# Altium PCB Power_Test.PcbDoc
Units mm, origin at the board's own origin, x right, y up, seen from the top; angles counter-clockwise.
Board outline 29.84 x 31.62 mm, 2 copper layers (Top Layer, Bottom Layer); 30 components, 17 nets, 83 pads, 52 vias.
Unrouted connection lines stored in the file: 17.
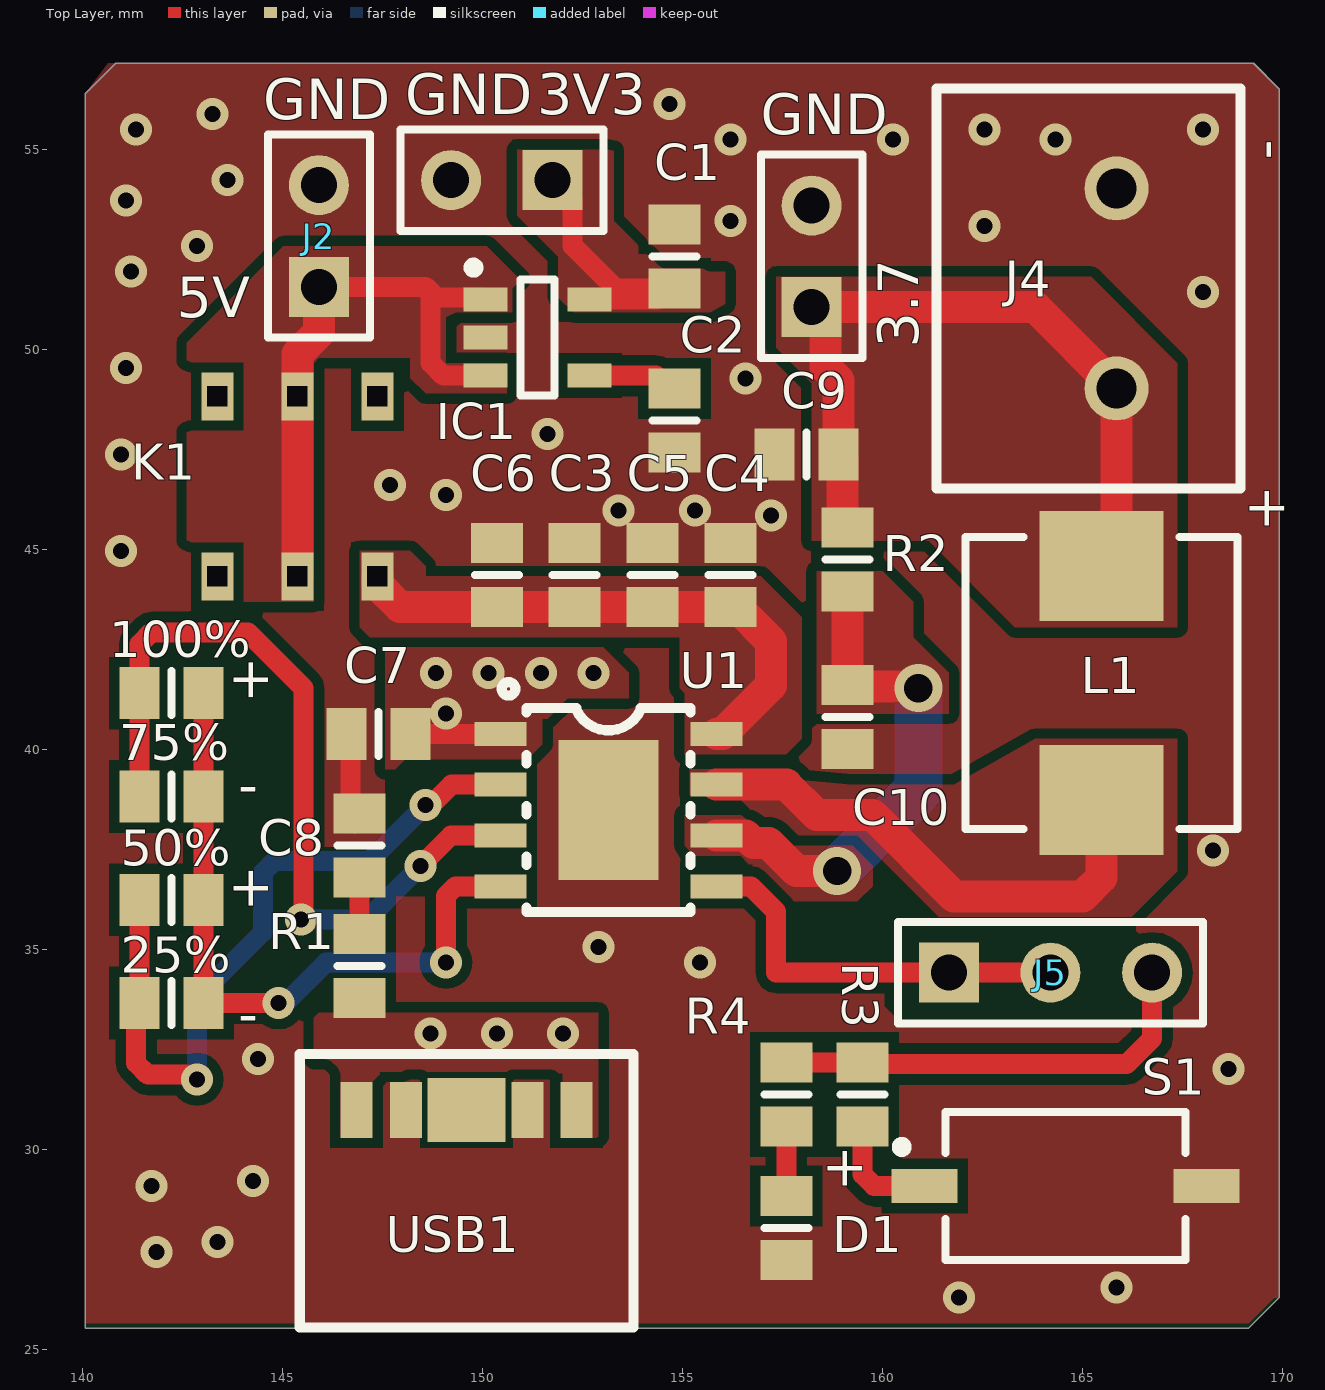
[diagram p0: Top Layer view]
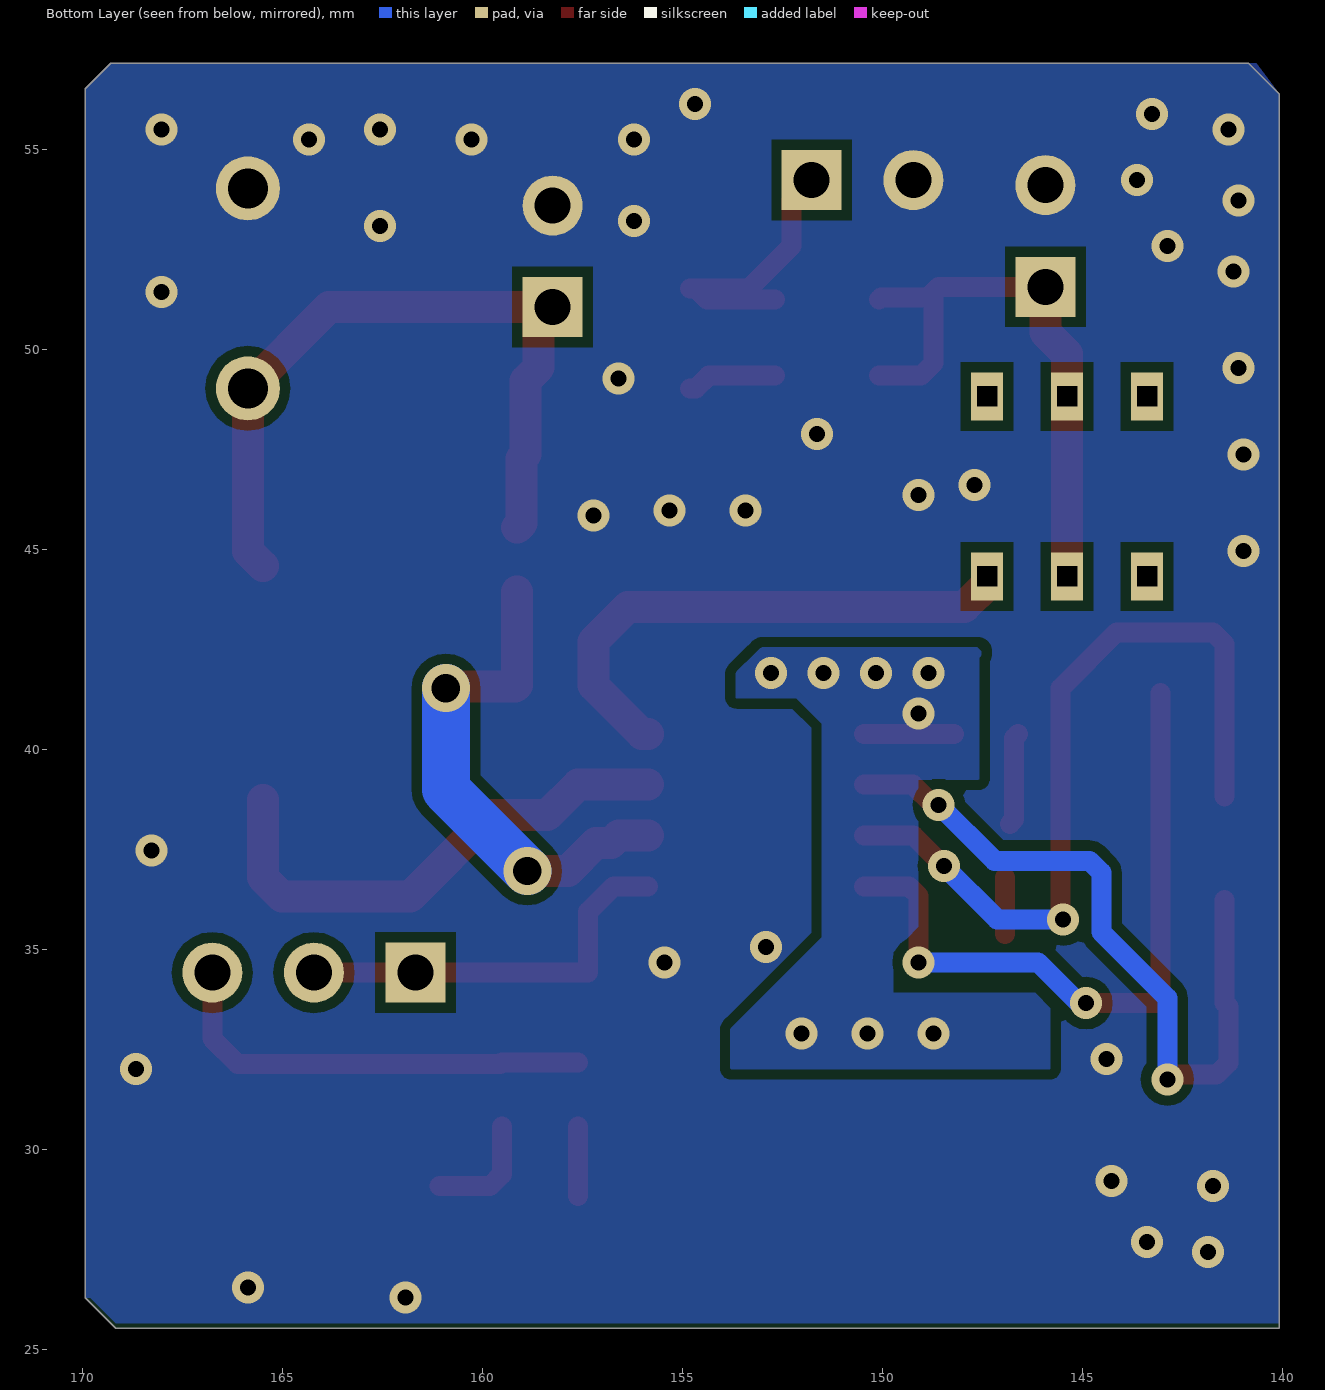
[diagram p1: Bottom Layer view, seen from below]

## Layer stack, top to bottom
Top Solder: solder mask 0.0102, Solder Resist, Dk 3.5
Top Layer: signal copper 0.0356
Dielectric 1: dielectric 0.32, FR-4, Dk 4.8
Bottom Layer: signal copper 0.0356
Bottom Solder: solder mask 0.0102, Solder Resist, Dk 3.5

## Board outline
140.081,25.527 140.081,56.388 140.843,57.15 169.291,57.15 169.926,56.515 169.926,26.289 169.164,25.527

## Design rules (kind name [scope] priority, off if disabled: settings)
Clearance [All] p1: gap=0.254 ignorepadtopadclearanceinfootprint=FALSE except(0: Arc-Hole Track-Hole SMDPad-SMDPad SMDPad-Hole THPad-Hole Via-Hole Fill-Hole Poly-Hole Region-Hole Text-Hole)
PlaneConnect [All] p1: planeconnectstyle=Direct reliefexpansion=0.508 reliefentries=4 reliefconductorwidth=0.254 reliefairgap=0.254
PolygonConnect [All] p1: connectstyle=Direct reliefconductorwidth=0.254 reliefentries=4 polygonreliefangle="90 Angle" airgapwidth=0.254
RoutingVias [All] p1: holewidth=0.4 width=0.8 viastyle="Through Hole" minholewidth=0.4 minwidth=0.8 maxholewidth=0.8 maxwidth=1.2
SolderMaskExpansion [All] p1: expansion=0.102
Width [All] p1: maxlimit=1.2 minlimit=0.3 preferedwidth=0.5
29 further rules are at their usual default settings.

## Classes and differential pairs
component class Power: 25% 50% 75% 100% C1 C2 C3 C4 C5 C6 C7 C8 C9 C10 D1 IC1 J2 J4 K1 L1 R1 R2 R3 R4 S1 U1 USB1

## Components (designator, comment, footprint, x,y, rotation, side; value= is the part's Value field where it differs from the comment)
25% "LED" 6-0805_L 142.24,33.655 r0 top
50% "LED" 6-0805_L 142.24,36.237 r180 top
75% "LED" 6-0805_L 142.24,38.82 r0 top
100% "LED" 6-0805_L 142.24,41.402 r180 top
C1 "2.2uF" 6-0805_L 154.813,52.324 r270 top
C2 "470pF" 6-0805_L 154.813,48.222 r90 top
C3 "22uf" 6-0805_L 152.315,44.361 r90 top
C4 "22uf" 6-0805_L 156.21,44.361 r90 top
C5 "22uf" 6-0805_L 154.263,44.361 r90 top
C6 "22uf" 6-0805_L 150.368,44.361 r90 top
C7 "10uf" 6-0805_L 147.409,40.386 r180 top
C8 "10uf" 6-0805_L 146.939,37.592 r90 top
C9 "22uf" 6-0805_L 158.115,47.371 r180 top
C10 "22uf" 6-0805_L 159.131,40.805 r270 top
D1 "LED" 6-0805_L 157.607,28.029 r270 top
IC1 "MIC5205-3.3" SOT-23-5 151.384,50.292 r0 top
J1 "3.3v" HDR1X2 151.765,54.229 r180 top
J2 "5v" HDR1X2 145.923,51.562 r90 top
J3 "3.7v" HDR1X2 158.242,51.054 r90 top
J4 "BAT" 接线座2P 165.862,51.522 r90 top
J5 "CON3" HDR1X3 161.671,34.417 r0 top
K1 "BUTTON" switch 143.383,44.323 r90 top
L1 "1UH" 0630电感 165.481,41.652 r90 top
R1 "2R" 6-0805_L 146.939,34.582 r270 top
R2 "0.5R" 6-0805_L 159.131,44.742 r270 top
R3 "10K" 6-0805_L 159.512,31.369 r90 top
R4 "20R" 6-0805_L 157.607,31.369 r90 top
S1 "SW SPST" button 164.592,29.083 r0 top
U1 "IP5306" ESOP8 149.679,40.376 r0 top
USB1 "USB" Type-C 149.614,30.988 r0 top

## Footprints (in the part's own frame and the unit in brackets; to place one, negate y for a bottom-side part, rotate by r counter-clockwise, add the part's x,y. Pads: shape width x height; smd on the part's side, far side on the other; paste and mask are expansions set on the pad)
6-0805_L [mm] "Chip Resistor, Body 2.0x1.2mm, IPC High Density"
  rect 1x1.3 smd: 1(-0.8,0) 2(0.8,0)
  silkscreen extent 0,-0.55 0,0.55, body extent -1.07,-0.7 1.07,0.7, height 0.7
0630电感 [mm] "Precision Wire Wound Inductor, 2-Leads, Body 7.30x6.60mm, IPC Medium Density"
  rect 2.75x3.1 smd: 1(-2.925,0) 2(2.925,0)
  silkscreen extent -3.65,-3.4 3.65,3.4, body extent -3.65,-3.4 3.65,3.4, height 3
button [mm] "SODFL, 2-Leads, Body 3.70x8.00mm, IPC Medium Density"
  rect 1.65x0.85 smd: 1(-3.525,0) 2(3.525,0)
  silkscreen extent -4.22,-1.85 3,1.85, body extent -3,-1.85 3,1.85, height 2.5
ESOP8 [mm]
  rect 1.3x0.6 smd: 1(0.783,0.01) 2(0.783,-1.26) 3(0.783,-2.53) 4(0.783,-3.8) 5(6.183,-3.8) 6(6.183,-2.53) 7(6.183,-1.26) 8(6.183,0.01)
  rect 2.5x3.5 smd: 9(3.483,-1.895)
  silkscreen extent 0.81,-4.44 5.53,1.3
HDR1X2 [mm] "Connector; Header; 2 Position"
  rect 1.5x1.5 hole 0.9: 1(0,0)
  round 1.5 hole 0.9: 2(2.54,0)
  silkscreen extent -1.27,-1.27 3.81,1.27
HDR1X3 [mm] "Connector; Header; 3 Position"
  rect 1.5x1.5 hole 0.9: 1(0,0)
  round 1.5 hole 0.9: 2(2.54,0) 3(5.08,0)
  silkscreen extent -1.27,-1.27 6.35,1.27
SOT-23-5 [mm]
  rect 1.1x0.6 smd: 1(-1.3,0.95) 2(-1.3,0) 3(-1.3,-0.95) 4(1.3,-0.95) 5(1.3,0.95)
  silkscreen extent -1.72,-1.45 0.43,1.87, body extent -1.37,-1.45 1.43,1.45, height 1.45
switch [mm]
  rect 1.2x0.8 hole 0.5 square: 1(0,0) 2(0,-2) 3(0,-4) 4(4.5,-4) 5(4.5,-2) 6(4.5,0)
Type-C [mm] "贴片母头"
  rect 0.8x1.4 smd: 1(-2.75,0) 1(2.75,0) 2(-1.52,0) 2(1.52,0) ""(-0.5,0) ""(0.5,0)
  rect 1.95x1.2 smd: ""(0,0) ""(0,0)
  rect 1.95x1.6 smd: ""(0,0) ""(0,0)
  silkscreen extent -4.17,-5.44 4.17,1.4
接线座2P [mm]
  round 1.6 hole 1: 1(-2.5,0) 2(2.5,0)
  silkscreen extent -5,-3.1 5,4.5

## Part data
C1 C2: library part "Cap Semi", "Capacitor (Semiconductor SIM Model)", LatestRevisionDate=29-May-2009, LatestRevisionNote="IPC-7351 Footprint Added.", PackageDescription="Chip Capacitor", PackageReference=C1206, Published=8-Jun-2000, Publisher="Altium Limited"
C3 C4 C5 C6 C7 C8 C9 C10: library part CAP, "电容"
IC1: "稳压"
J1 J2 J3 J4: library part CON2, "连接器"
J5: "连接器"
K1: "自锁按键"
L1: library part Inductor, "电感"
R1 R2 R3 R4: library part RES, "电阻"
USB1: library part CON2, "Conjunctor"

## Via types
v1: diameter 0.8, hole 0.4, Top Layer to Bottom Layer, tented both sides, 50 vias
v2: diameter 1.2, hole 0.711, Top Layer to Bottom Layer, tented both sides, 2 vias

## Nets (pads, with @x,y where several pads share a name; then routed paths per layer and width w, separated by ;. In a path a pad name is that pad's centre, name@x,y a point inside that pad or via, vN(x,y) a via of type N, cw(c..) or ccw(c..) an arc to the next point about the centre after c; other vN are vias at no path point)
GND: C1.1 C2.1 C3.2 C4.2 C5.2 C6.2 C7.2 C8.2 C9.2 C10.2 D1.2 IC1.2 J1.2 J2.2 J3.2 J4.2 S1.2 U1.9 USB1.2 USB1.@149.614,30.988 | length 2.3
  Top Layer w0.5: C7.2 146.71,40.285 146.71,38.24 C8.2@146.812,38.138
  other v1: 161.925,26.289 165.862,26.543 141.859,27.432 143.383,27.686 141.732,29.083 144.272,29.21 168.656,32.004 144.399,32.258 155.448,34.671 152.908,35.052 168.275,37.465 140.97,44.958 157.226,45.847 153.416,45.974 155.321,45.974 149.098,46.355 147.701,46.609 140.97,47.371 151.638,47.879 156.591,49.276 141.097,49.53 168.021,51.435 141.224,51.943 142.875,52.578 162.56,53.086 156.21,53.213 141.097,53.721 143.637,54.229 156.21,55.245 160.274,55.245 164.338,55.245 141.351,55.499 162.56,55.499 168.021,55.499 143.256,55.88 154.686,56.134
Net25%_A: 25%.1 50%.2 U1.2 | length 18.5
  Top Layer w0.5: 50%.2 25%.1 141.351,33.566 141.351,32.158 141.644,31.865 142.76,31.865 v1(142.875,31.75) ; v1(148.59,38.608) 148.731,38.608 149.239,39.116 U1.2
  Bottom Layer w0.5: v1(142.875,31.75) 142.875,33.782 144.526,35.433 144.526,36.918 144.819,37.211 147.193,37.211 v1(148.59,38.608)
Net25%_K: 25%.2 50%.1 75%.2 100%.1 U1.4 | length 17.4
  Top Layer w0.5: 100%.1 75%.2 50%.1 25%.2 v1(144.907,33.655) ; v1(149.098,34.671) 149.098,36.338 149.336,36.576 U1.4
  Bottom Layer w0.5: v1(144.907,33.655) 145.088,33.655 146.104,34.671 v1(149.098,34.671)
Net75%_A: 75%.1 100%.2 U1.3 | length 20.3
  Top Layer w0.5: 75%.1 100%.2 141.44,42.633 141.733,42.926 144.145,42.926 145.542,41.529 145.542,35.814 v1(145.478,35.75) ; v1(148.463,37.084) 149.225,37.846 U1.3
  Bottom Layer w0.5: v1(145.478,35.75) 147.13,35.75 v1(148.463,37.084)
NetC1_2: C1.2 IC1.5 J1.1 | length 6.9
  Top Layer w0.5: J1.1 152.265,53.729 152.265,52.586 153.327,51.524 C1.2@154.663,51.524 ; IC1.5 154.381,51.242 C1.2@154.663,51.524 ; C1.2 C1.2@154.663,51.524
NetC2_2: C2.2 IC1.4 | length 2.3
  Top Layer w0.5: IC1.4 154.343,49.342 154.663,49.022 C2.2
NetC3_1: C3.1 C4.1 C5.1 C6.1 K1.3 U1.8 | length 13.6
  Top Layer w0.8: K1.3 147.383,44.123 147.945,43.561 C6.1 C3.1 C5.1 C4.1 156.36,43.561 157.226,42.695 157.226,41.6 156.012,40.386 U1.8
NetC7_1: C7.1 R1.2 U1.1 USB1.1 | length 2.3
  Top Layer w0.5: C7.1 U1.1
  other v1: 148.717,32.893 150.368,32.893 152.019,32.893 149.098,40.894 148.844,41.91 150.156,41.91 151.469,41.91 152.781,41.91
NetC8_1: C8.1 R1.1 | length 1.4
  Top Layer w0.5: R1.1 C8.1
NetC9_1: C9.1 J3.1 J4.1 L1.2 R2.1 | length 19
  Top Layer w0.8: R2.1 159.115,45.542 159.015,45.642 159.015,47.271 C9.1 158.915,49.221 158.592,49.544 158.592,50.704 J3.1 163.83,51.054 J4.1 165.862,44.958 L1.2
NetC10_1: C10.1 R2.2 U1.6 | length 12.9
  Top Layer w0.8: U1.6 156.591,37.846 156.781,37.655 157.162,37.655 157.861,36.957 v2(158.877,36.957) ; R2.2 C10.1 159.169,41.567 160.871,41.567 v2(160.909,41.529)
  Bottom Layer w1.2: v2(158.877,36.957) 160.909,38.989 v2(160.909,41.529)
NetD1_A: D1.1 R4.1 | length 1.7
  Top Layer w0.5: D1.1 R4.1
NetIC1_1: IC1.1 IC1.3 J2.1 K1.2 K1.5 | length 15
  Top Layer w0.5: J2.1 148.59,51.562 148.717,51.435 ; IC1.3 149.032,49.342 148.717,49.657 148.717,51.435 ; IC1.1 150.034,51.292 148.86,51.292 148.717,51.435
  Top Layer w0.8: K1.2 K1.5 145.383,49.879 145.923,50.419 J2.1
NetJ5_1: J5.1 J5.2 U1.5 | length 10.1
  Top Layer w0.5: U1.5 156.718,36.576 157.353,35.941 157.353,34.417 J5.1 J5.2
NetJ5_3: J5.3 R3.2 R4.2 | length 11.1
  Top Layer w0.5: R4.2 R3.2 159.55,32.131 166.116,32.131 166.751,32.766 J5.3
NetL1_1: L1.1 U1.7 | length 12.9
  Top Layer w0.8: U1.7 157.607,39.116 158.369,38.354 159.766,38.354 161.798,36.322 165.012,36.322 165.481,36.791 L1.1
NetR3_1: R3.1 S1.1 | length 2.9
  Top Layer w0.5: R3.1 159.512,29.376 159.805,29.083 S1.1
pads on no net: K1.1 K1.4 K1.6 USB1.@149.114,30.988 USB1.@150.114,30.988

## Polygon pours and split planes (outlines as drawn)
NetC1_2 on Top Layer "Top Layer-NetC1_2" (solid, remove dead copper, pour order 14): 153.289,54.991 153.289,53.213 154.432,52.07 156.083,52.07 156.083,51.136 155.702,50.927 155.56,50.927 152.273,50.927 151.902,51.298 151.902,52.314 150.876,53.34 150.876,54.991
NetIC1_1 on Top Layer "Top Layer-NetIC1_1" (solid, remove dead copper, pour order 15): 145.796,43.688 142.875,43.688 142.621,43.942 142.621,50.165 145.034,52.578 150.123,52.578 150.959,51.742 150.749,51.532 150.749,50.927 149.479,50.927 149.352,50.927 149.098,50.8 149.098,49.657 150.622,49.657 150.622,48.895 148.59,48.895 148.209,49.276 148.209,49.784 145.923,49.784 145.796,49.657
GND on Top Layer "Top Layer-No Net" (solid, remove dead copper, pour order 22): 140.653,57.15 169.291,57.15 169.926,56.515 169.926,26.289 169.799,26.289 169.164,25.654 140.081,25.654 140.081,56.388
NetC10_1 on Top Layer "Top Layer-NetC10_1" (solid, remove dead copper, pour order 20): 159.258,37.592 159.766,37.084 159.766,36.576 159.385,36.195 157.607,36.195 156.464,37.338 155.321,37.338 155.067,37.592 155.067,38.354 156.591,38.354 156.591,38.1 157.099,37.592
NetC10_1 on Top Layer "Top Layer-NetC10_1 1" (solid, remove dead copper, pour order 19): 160.02,44.45 160.782,43.688 160.782,42.799 161.671,41.91 161.671,40.894 158.369,40.894 158.369,44.45
NetL1_1 on Top Layer "Top Layer-NetL1_1" (solid, remove dead copper, pour order 18): 163.83,40.259 167.386,40.259 167.386,36.957 166.243,35.814 161.417,35.814 159.385,37.846 157.353,37.846 156.337,38.862 155.194,38.862 155.194,39.497 157.29,39.497 157.925,39.243 159.258,39.116 161.798,39.116
NetC9_1 on Top Layer "Top Layer-NetC9_1" (solid, remove dead copper, pour order 17): 157.353,51.816 165.227,51.816 167.386,49.657 167.386,43.053 163.322,43.053 161.163,45.212 158.242,45.212 158.242,49.149 157.353,50.038
NetC3_1 on Top Layer "Top Layer-NetC3_1" (solid, remove dead copper, pour order 16): 146.939,44.958 148.209,44.958 148.59,44.577 148.59,44.323 156.972,44.323 157.988,43.307 157.988,40.259 157.607,39.878 155.067,39.878 155.067,41.402 154.94,41.529 154.94,42.799 147.193,42.799 146.939,43.053
NetC7_1 on Top Layer "Top Layer-NetC7_1" (solid, remove dead copper, pour order 12): 147.828,39.497 148.082,39.751 151.13,39.751 151.511,40.132 151.511,40.767 151.638,40.767 152.146,41.275 153.67,41.275 153.67,41.91 153.035,42.545 147.574,42.545 147.574,39.497
NetC7_1 on Top Layer "Top Layer-NetC7_1 1" (solid, remove dead copper, pour order 10): 145.923,33.42 145.796,33.293 145.796,32.15 145.919,32.15 146.304,31.765 146.304,30.353 147.229,30.353 147.229,31.659 147.466,31.896 152.019,31.896 152.019,30.245 152.781,30.245 152.908,30.245 152.908,33.42
GND on Bottom Layer "Bottom Layer-GND" (solid, remove dead copper, pour order 21): 140.653,57.15 169.291,57.15 169.926,56.515 169.926,26.289 169.799,26.289 169.164,25.654 140.081,25.654 140.081,56.388
NetC7_1 on Bottom Layer "Bottom Layer-NetC7_1" (solid, pour order 6): 145.796,32.004 153.797,32.004 153.797,33.02 151.511,35.306 151.511,40.64 152.146,41.275 153.67,41.275 153.67,41.91 153.035,42.545 147.574,42.545 147.447,42.418 147.574,42.291 147.574,39.243 149.098,39.243 149.098,35.56 149.733,34.925 149.733,33.909 146.177,33.909 145.796,33.528

## Other copper
Top Layer:
  pour cut-out: 158.003,32.608 158.227,32.608 158.227,30.742 158.166,30.681 158.04,30.681
  pour cut-out: 160.304,36.068 160.825,36.068 161.318,35.575 166.342,35.575 166.342,35.334 166.491,35.185 166.491,33.153 160.487,33.153 160.064,33.576 160.064,34.275
  pour cut-out: 160.02,36.83 160.782,36.068 159.889,36.068 159.757,36.2
  pour cut-out: 147.574,39.238 147.818,39.482 148.698,39.482 148.698,36.426 148.584,36.312 148.574,36.322 147.574,36.322
  pour cut-out: 149.431,37.325 151.333,37.325 151.366,37.292 151.366,37.13 149.415,37.13 149.375,37.09
  pour cut-out: 149.352,38.735 149.525,38.562 151.366,38.562 151.366,38.4 151.326,38.36 149.389,38.36

## Silkscreen, mask and mechanical layers (free items; w line width, h text height)
Top Overlay:
  text "GND" at 148.082,55.88 h1.02
  text "3V3" at 151.384,55.88 h1.02
  text "GND" at 144.526,55.753 h1.02
  text "GND" at 156.972,55.372 h1.02
  text "-" at 170.053,54.737 h1.02 r90
  text "5V" at 142.367,50.8 h1.02
  text "3.7" at 160.909,50.038 h1.02 r90
  text "+" at 169.037,45.593 h1.02
  text "+" at 144.653,41.148 h1.02 r90
  text "-" at 144.399,39.37 h1.02 r180
  text "+" at 144.653,35.941 h1.02 r90
  text "-" at 144.399,33.655 h1.02 r180
  text "+" at 158.496,29.083 h1.02
Mechanical 1:
  the board outline again, w0.254

## Text inside footprints (layer, text, board x,y; h text height)
IC1: Mechanical 15 "1" at 151.834,50.128 h0.9 r90